# Altium PCB TypeC_proto.PcbDoc
Units mil, origin at the board's own origin, x right, y up, seen from the top; angles counter-clockwise.
Board outline 8818.9 x 2803.15 mil, 2 copper layers (Top Layer, Bottom Layer); 1 components, 0 nets, 2024 pads, 0 vias.
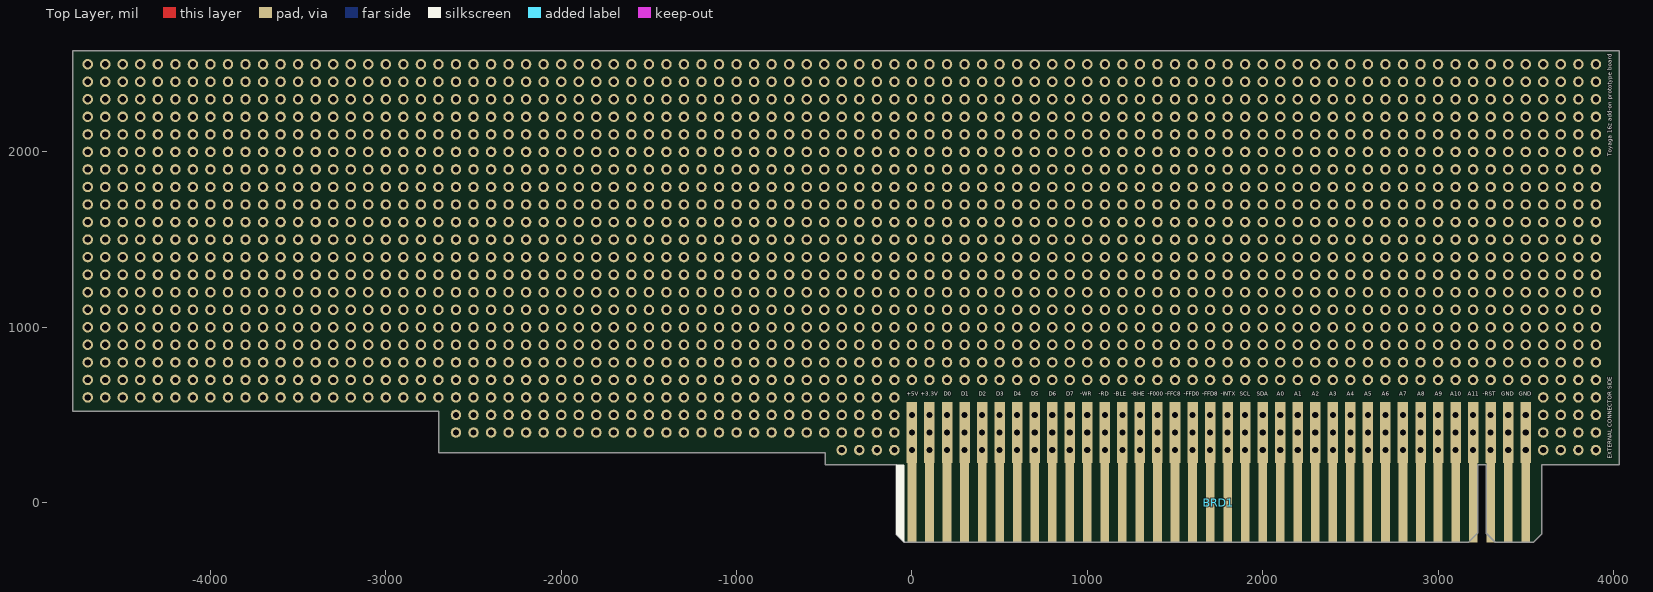
[diagram p0: Top Layer view]
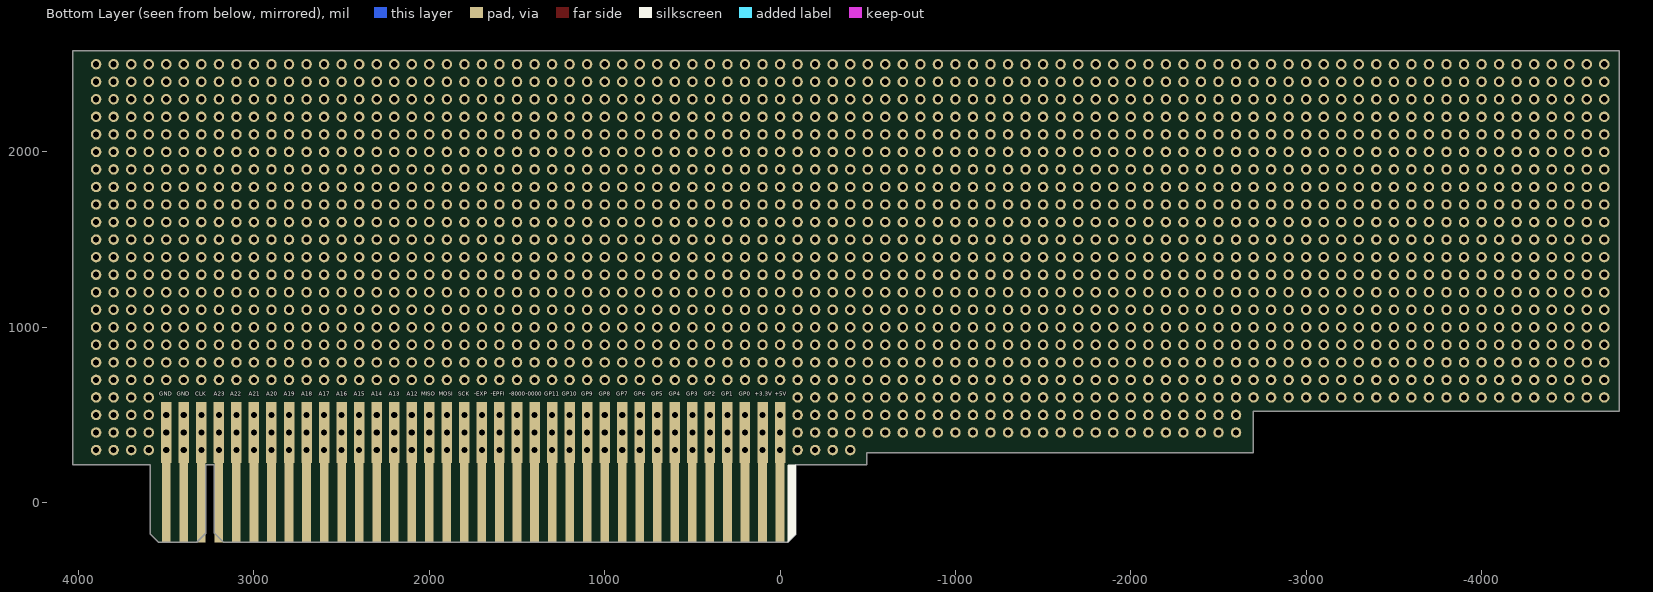
[diagram p1: Bottom Layer view, seen from below]

## Layer stack, top to bottom
Top Layer: signal copper 1.4
Dielectric: dielectric 12.6, FR-4, Dk 4.8
Bottom Layer: signal copper 1.4

## Board outline
-494.09,214.87 -90,214.87 -90,-180 -43.93,-226.07 3173.93,-226.07 3225,-175 3225,214.87 3275,214.87 3275,-175 3326.07,-226.07 3543.93,-226.07 3590,-180 3590,214.87 4033.46,214.87 4033.46,2577.08 -4785.43,2577.08 -4785.43,521.96 -2698.82,521.96 -2698.82,285.74 -494.09,285.74

## Design rules (kind name [scope] priority, off if disabled: settings)
Clearance [All] p1: gap=10
PolygonConnect [All] p1: connectstyle=Relief reliefconductorwidth=10 reliefentries=4 polygonreliefangle="90 Angle" airgapwidth=10
RoutingVias [All] p1: holewidth=28 width=50 viastyle="Through Hole" minholewidth=28 minwidth=50 maxholewidth=28 maxwidth=50
SolderMaskExpansion [All] p1: expansion=4
Width [All] p1: maxlimit=10 minlimit=10 preferedwidth=10
28 further rules are at their usual default settings.

## Components (designator, comment, footprint, x,y, rotation, side; value= is the part's Value field where it differs from the comment)
BRD1 "16z" 16z_sizeC 4033.46,214.87 r0 top locked

## Footprints (in the part's own frame and the unit in brackets; to place one, negate y for a bottom-side part, rotate by r counter-clockwise, add the part's x,y. Pads: shape width x height; smd on the part's side, far side on the other; paste and mask are expansions set on the pad)
16z_sizeC [mm] "Toyaga 16z add-on card size C (224mm length)"
  rect 1.25x11.5 smd: 1(-102.45,-5.458) 3(-99.91,-5.458) 5(-97.37,-5.458) 7(-94.83,-5.458) 9(-92.29,-5.458) 11(-89.75,-5.458) 13(-87.21,-5.458) 15(-84.67,-5.458) 17(-82.13,-5.458) 19(-79.59,-5.458) 21(-77.05,-5.458) 23(-74.51,-5.458) 25(-71.97,-5.458) 27(-69.43,-5.458) 29(-66.89,-5.458) 31(-64.35,-5.458) 33(-61.81,-5.458) 35(-59.27,-5.458) 37(-56.73,-5.458) 39(-54.19,-5.458) 41(-51.65,-5.458) 43(-49.11,-5.458) 45(-46.57,-5.458) 47(-44.03,-5.458) 49(-41.49,-5.458) 51(-38.95,-5.458) 53(-36.41,-5.458) 55(-33.87,-5.458) 57(-31.33,-5.458) 59(-28.79,-5.458) 61(-26.25,-5.458) 63(-23.71,-5.458) 65(-21.17,-5.458) 67(-18.63,-5.458) 69(-16.09,-5.458) 71(-13.55,-5.458)
  rect 1.25x11.5 smd far side: 2(-102.45,-5.458) 4(-99.91,-5.458) 6(-97.37,-5.458) 8(-94.83,-5.458) 10(-92.29,-5.458) 12(-89.75,-5.458) 14(-87.21,-5.458) 16(-84.67,-5.458) 18(-82.13,-5.458) 20(-79.59,-5.458) 22(-77.05,-5.458) 24(-74.51,-5.458) 26(-71.97,-5.458) 28(-69.43,-5.458) 30(-66.89,-5.458) 32(-64.35,-5.458) 34(-61.81,-5.458) 36(-59.27,-5.458) 38(-56.73,-5.458) 40(-54.19,-5.458) 42(-51.65,-5.458) 44(-49.11,-5.458) 46(-46.57,-5.458) 48(-44.03,-5.458) 50(-41.49,-5.458) 52(-38.95,-5.458) 54(-36.41,-5.458) 56(-33.87,-5.458) 58(-31.33,-5.458) 60(-28.79,-5.458) 62(-26.25,-5.458) 64(-23.71,-5.458) 66(-21.17,-5.458) 68(-18.63,-5.458) 70(-16.09,-5.458) 72(-13.55,-5.458)
  silkscreen extent -104.74,-11.2 -103.57,0

## Part data
BRD1: library part 16z_edge, "Toyaga 16z board edge connector"

## Free pads (board coordinates)
  round 60 hole 35: 0(-4700,600) 0(-4700,700) 0(-4700,800) 0(-4700,900) 0(-4700,1000) 0(-4700,1100) 0(-4700,1200) 0(-4700,1300) 0(-4700,1400) 0(-4700,1500) 0(-4700,1600) 0(-4700,1700) 0(-4700,1800) 0(-4700,1900) 0(-4700,2000) 0(-4700,2100) 0(-4700,2200) 0(-4700,2300) 0(-4700,2400) 0(-4700,2500) 0(-4600,600) 0(-4600,700) 0(-4600,800) 0(-4600,900) 0(-4600,1000) 0(-4600,1100) 0(-4600,1200) 0(-4600,1300) 0(-4600,1400) 0(-4600,1500) 0(-4600,1600) 0(-4600,1700) 0(-4600,1800) 0(-4600,1900) 0(-4600,2000) 0(-4600,2100) 0(-4600,2200) 0(-4600,2300) 0(-4600,2400) 0(-4600,2500) 0(-4500,600) 0(-4500,700) 0(-4500,800) 0(-4500,900) 0(-4500,1000) 0(-4500,1100) 0(-4500,1200) 0(-4500,1300) 0(-4500,1400) 0(-4500,1500) 0(-4500,1600) 0(-4500,1700) 0(-4500,1800) 0(-4500,1900) 0(-4500,2000) 0(-4500,2100) 0(-4500,2200) 0(-4500,2300) 0(-4500,2400) 0(-4500,2500) 0(-4400,600) 0(-4400,700) 0(-4400,800) 0(-4400,900) 0(-4400,1000) 0(-4400,1100) 0(-4400,1200) 0(-4400,1300) 0(-4400,1400) 0(-4400,1500) 0(-4400,1600) 0(-4400,1700) 0(-4400,1800) 0(-4400,1900) 0(-4400,2000) 0(-4400,2100) 0(-4400,2200) 0(-4400,2300) 0(-4400,2400) 0(-4400,2500) 0(-4300,600) 0(-4300,700) 0(-4300,800) 0(-4300,900) 0(-4300,1000) 0(-4300,1100) 0(-4300,1200) 0(-4300,1300) 0(-4300,1400) 0(-4300,1500) 0(-4300,1600) 0(-4300,1700) 0(-4300,1800) 0(-4300,1900) 0(-4300,2000) 0(-4300,2100) 0(-4300,2200) 0(-4300,2300) 0(-4300,2400) 0(-4300,2500) 0(-4200,600) 0(-4200,700) 0(-4200,800) 0(-4200,900) 0(-4200,1000) 0(-4200,1100) 0(-4200,1200) 0(-4200,1300) 0(-4200,1400) 0(-4200,1500) 0(-4200,1600) 0(-4200,1700) 0(-4200,1800) 0(-4200,1900) 0(-4200,2000) 0(-4200,2100) 0(-4200,2200) 0(-4200,2300) 0(-4200,2400) 0(-4200,2500) 0(-4100,600) 0(-4100,700) 0(-4100,800) 0(-4100,900) 0(-4100,1000) 0(-4100,1100) 0(-4100,1200) 0(-4100,1300) 0(-4100,1400) 0(-4100,1500) 0(-4100,1600) 0(-4100,1700) 0(-4100,1800) 0(-4100,1900) 0(-4100,2000) 0(-4100,2100) 0(-4100,2200) 0(-4100,2300) 0(-4100,2400) 0(-4100,2500) 0(-4000,600) 0(-4000,700) 0(-4000,800) 0(-4000,900) 0(-4000,1000) 0(-4000,1100) 0(-4000,1200) 0(-4000,1300) 0(-4000,1400) 0(-4000,1500) 0(-4000,1600) 0(-4000,1700) 0(-4000,1800) 0(-4000,1900) 0(-4000,2000) 0(-4000,2100) 0(-4000,2200) 0(-4000,2300) 0(-4000,2400) 0(-4000,2500) 0(-3900,600) 0(-3900,700) 0(-3900,800) 0(-3900,900) 0(-3900,1000) 0(-3900,1100) 0(-3900,1200) 0(-3900,1300) 0(-3900,1400) 0(-3900,1500) 0(-3900,1600) 0(-3900,1700) 0(-3900,1800) 0(-3900,1900) 0(-3900,2000) 0(-3900,2100) 0(-3900,2200) 0(-3900,2300) 0(-3900,2400) 0(-3900,2500) 0(-3800,600) 0(-3800,700) 0(-3800,800) 0(-3800,900) 0(-3800,1000) 0(-3800,1100) 0(-3800,1200) 0(-3800,1300) 0(-3800,1400) 0(-3800,1500) 0(-3800,1600) 0(-3800,1700) 0(-3800,1800) 0(-3800,1900) 0(-3800,2000) 0(-3800,2100) 0(-3800,2200) 0(-3800,2300) 0(-3800,2400) 0(-3800,2500) 0(-3700,600) 0(-3700,700) 0(-3700,800) 0(-3700,900) 0(-3700,1000) 0(-3700,1100) 0(-3700,1200) 0(-3700,1300) 0(-3700,1400) 0(-3700,1500) 0(-3700,1600) 0(-3700,1700) 0(-3700,1800) 0(-3700,1900) 0(-3700,2000) 0(-3700,2100) 0(-3700,2200) 0(-3700,2300) 0(-3700,2400) 0(-3700,2500) 0(-3600,600) 0(-3600,700) 0(-3600,800) 0(-3600,900) 0(-3600,1000) 0(-3600,1100) 0(-3600,1200) 0(-3600,1300) 0(-3600,1400) 0(-3600,1500) 0(-3600,1600) 0(-3600,1700) 0(-3600,1800) 0(-3600,1900) 0(-3600,2000) 0(-3600,2100) 0(-3600,2200) 0(-3600,2300) 0(-3600,2400) 0(-3600,2500) 0(-3500,600) 0(-3500,700) 0(-3500,800) 0(-3500,900) 0(-3500,1000) 0(-3500,1100) 0(-3500,1200) 0(-3500,1300) 0(-3500,1400) 0(-3500,1500) 0(-3500,1600) 0(-3500,1700) 0(-3500,1800) 0(-3500,1900) 0(-3500,2000) 0(-3500,2100) 0(-3500,2200) 0(-3500,2300) 0(-3500,2400) 0(-3500,2500) 0(-3400,600) 0(-3400,700) 0(-3400,800) 0(-3400,900) 0(-3400,1000) 0(-3400,1100) 0(-3400,1200) 0(-3400,1300) 0(-3400,1400) 0(-3400,1500) 0(-3400,1600) 0(-3400,1700) 0(-3400,1800) 0(-3400,1900) 0(-3400,2000) 0(-3400,2100) 0(-3400,2200) 0(-3400,2300) 0(-3400,2400) 0(-3400,2500) 0(-3300,600) 0(-3300,700) 0(-3300,800) 0(-3300,900) 0(-3300,1000) 0(-3300,1100) 0(-3300,1200) 0(-3300,1300) 0(-3300,1400) 0(-3300,1500) 0(-3300,1600) 0(-3300,1700) 0(-3300,1800) 0(-3300,1900) 0(-3300,2000) 0(-3300,2100) 0(-3300,2200) 0(-3300,2300) 0(-3300,2400) 0(-3300,2500) 0(-3200,600) 0(-3200,700) 0(-3200,800) 0(-3200,900) 0(-3200,1000) 0(-3200,1100) 0(-3200,1200) 0(-3200,1300) 0(-3200,1400) 0(-3200,1500) 0(-3200,1600) 0(-3200,1700) 0(-3200,1800) 0(-3200,1900) 0(-3200,2000) 0(-3200,2100) 0(-3200,2200) 0(-3200,2300) 0(-3200,2400) 0(-3200,2500) 0(-3100,600) 0(-3100,700) 0(-3100,800) 0(-3100,900) 0(-3100,1000) 0(-3100,1100) 0(-3100,1200) 0(-3100,1300) 0(-3100,1400) 0(-3100,1500) 0(-3100,1600) 0(-3100,1700) 0(-3100,1800) 0(-3100,1900) 0(-3100,2000) 0(-3100,2100) 0(-3100,2200) 0(-3100,2300) 0(-3100,2400) 0(-3100,2500) 0(-3000,600) 0(-3000,700) 0(-3000,800) 0(-3000,900) 0(-3000,1000) 0(-3000,1100) 0(-3000,1200) 0(-3000,1300) 0(-3000,1400) 0(-3000,1500) 0(-3000,1600) 0(-3000,1700) 0(-3000,1800) 0(-3000,1900) 0(-3000,2000) 0(-3000,2100) 0(-3000,2200) 0(-3000,2300) 0(-3000,2400) 0(-3000,2500) 0(-2900,600) 0(-2900,700) 0(-2900,800) 0(-2900,900) 0(-2900,1000) 0(-2900,1100) 0(-2900,1200) 0(-2900,1300) 0(-2900,1400) 0(-2900,1500) 0(-2900,1600) 0(-2900,1700) 0(-2900,1800) 0(-2900,1900) 0(-2900,2000) 0(-2900,2100) 0(-2900,2200) 0(-2900,2300) 0(-2900,2400) 0(-2900,2500) 0(-2800,600) 0(-2800,700) 0(-2800,800) 0(-2800,900) 0(-2800,1000) 0(-2800,1100) 0(-2800,1200) 0(-2800,1300) 0(-2800,1400) 0(-2800,1500) 0(-2800,1600) 0(-2800,1700) 0(-2800,1800) 0(-2800,1900) 0(-2800,2000) 0(-2800,2100) 0(-2800,2200) 0(-2800,2300) 0(-2800,2400) 0(-2800,2500) 0(-2700,600) 0(-2700,700) 0(-2700,800) 0(-2700,900) 0(-2700,1000) 0(-2700,1100) 0(-2700,1200) 0(-2700,1300) 0(-2700,1400) 0(-2700,1500) 0(-2700,1600) 0(-2700,1700) 0(-2700,1800) 0(-2700,1900) 0(-2700,2000) 0(-2700,2100) 0(-2700,2200) 0(-2700,2300) 0(-2700,2400) 0(-2700,2500) 0(-2600,400) 0(-2600,500) 0(-2600,600) 0(-2600,700) 0(-2600,800) 0(-2600,900) 0(-2600,1000) 0(-2600,1100) 0(-2600,1200) 0(-2600,1300) 0(-2600,1400) 0(-2600,1500) 0(-2600,1600) 0(-2600,1700) 0(-2600,1800) 0(-2600,1900) 0(-2600,2000) 0(-2600,2100) 0(-2600,2200) 0(-2600,2300) 0(-2600,2400) 0(-2600,2500) 0(-2500,400) 0(-2500,500) 0(-2500,600) 0(-2500,700) 0(-2500,800) 0(-2500,900) 0(-2500,1000) 0(-2500,1100) 0(-2500,1200) 0(-2500,1300) 0(-2500,1400) 0(-2500,1500) 0(-2500,1600) 0(-2500,1700) 0(-2500,1800) 0(-2500,1900) 0(-2500,2000) 0(-2500,2100) 0(-2500,2200) 0(-2500,2300) 0(-2500,2400) 0(-2500,2500) 0(-2400,400) 0(-2400,500) 0(-2400,600) 0(-2400,700) 0(-2400,800) 0(-2400,900) 0(-2400,1000) 0(-2400,1100) 0(-2400,1200) 0(-2400,1300) 0(-2400,1400) 0(-2400,1500) 0(-2400,1600) 0(-2400,1700) 0(-2400,1800) 0(-2400,1900) 0(-2400,2000) 0(-2400,2100) 0(-2400,2200) 0(-2400,2300) 0(-2400,2400) 0(-2400,2500) 0(-2300,400) 0(-2300,500) 0(-2300,600) 0(-2300,700) 0(-2300,800) 0(-2300,900) 0(-2300,1000) 0(-2300,1100) 0(-2300,1200) 0(-2300,1300) 0(-2300,1400) 0(-2300,1500) 0(-2300,1600) 0(-2300,1700) 0(-2300,1800) 0(-2300,1900) 0(-2300,2000) 0(-2300,2100) 0(-2300,2200) 0(-2300,2300) 0(-2300,2400) 0(-2300,2500) 0(-2200,400) 0(-2200,500) 0(-2200,600) 0(-2200,700) 0(-2200,800) 0(-2200,900) 0(-2200,1000) 0(-2200,1100) 0(-2200,1200) 0(-2200,1300) 0(-2200,1400) 0(-2200,1500) 0(-2200,1600) 0(-2200,1700) 0(-2200,1800) 0(-2200,1900) 0(-2200,2000) 0(-2200,2100) 0(-2200,2200) 0(-2200,2300) 0(-2200,2400) 0(-2200,2500) 0(-2100,400) 0(-2100,500) 0(-2100,600) 0(-2100,700) 0(-2100,800) 0(-2100,900) 0(-2100,1000) 0(-2100,1100) 0(-2100,1200) 0(-2100,1300) 0(-2100,1400) 0(-2100,1500) 0(-2100,1600) 0(-2100,1700) 0(-2100,1800) 0(-2100,1900) 0(-2100,2000) 0(-2100,2100) 0(-2100,2200) 0(-2100,2300) 0(-2100,2400) 0(-2100,2500) 0(-2000,400) 0(-2000,500) 0(-2000,600) 0(-2000,700) 0(-2000,800) 0(-2000,900) 0(-2000,1000) 0(-2000,1100) 0(-2000,1200) 0(-2000,1300) 0(-2000,1400) 0(-2000,1500) 0(-2000,1600) 0(-2000,1700) 0(-2000,1800) 0(-2000,1900) 0(-2000,2000) 0(-2000,2100) 0(-2000,2200) 0(-2000,2300) 0(-2000,2400) 0(-2000,2500) 0(-1900,400) 0(-1900,500) 0(-1900,600) 0(-1900,700) 0(-1900,800) 0(-1900,900) 0(-1900,1000) 0(-1900,1100) 0(-1900,1200) 0(-1900,1300) 0(-1900,1400) 0(-1900,1500) 0(-1900,1600) 0(-1900,1700) 0(-1900,1800) 0(-1900,1900) 0(-1900,2000) 0(-1900,2100) 0(-1900,2200) 0(-1900,2300) 0(-1900,2400) 0(-1900,2500) 0(-1800,400) 0(-1800,500) 0(-1800,600) 0(-1800,700) 0(-1800,800) 0(-1800,900) 0(-1800,1000) 0(-1800,1100) 0(-1800,1200) 0(-1800,1300) 0(-1800,1400) 0(-1800,1500) 0(-1800,1600) 0(-1800,1700) 0(-1800,1800) 0(-1800,1900) 0(-1800,2000) 0(-1800,2100) 0(-1800,2200) 0(-1800,2300) 0(-1800,2400) 0(-1800,2500) 0(-1700,400) 0(-1700,500) 0(-1700,600) 0(-1700,700) 0(-1700,800) 0(-1700,900) 0(-1700,1000) 0(-1700,1100) 0(-1700,1200) 0(-1700,1300) 0(-1700,1400) 0(-1700,1500) 0(-1700,1600) 0(-1700,1700) 0(-1700,1800) 0(-1700,1900) 0(-1700,2000) 0(-1700,2100) 0(-1700,2200) 0(-1700,2300) 0(-1700,2400) 0(-1700,2500) 0(-1600,400) 0(-1600,500) 0(-1600,600) 0(-1600,700) 0(-1600,800) 0(-1600,900) 0(-1600,1000) 0(-1600,1100) 0(-1600,1200) 0(-1600,1300) 0(-1600,1400) 0(-1600,1500) 0(-1600,1600) 0(-1600,1700) 0(-1600,1800) 0(-1600,1900) 0(-1600,2000) 0(-1600,2100) 0(-1600,2200) 0(-1600,2300) 0(-1600,2400) 0(-1600,2500) 0(-1500,400) 0(-1500,500) 0(-1500,600) 0(-1500,700) 0(-1500,800) 0(-1500,900) 0(-1500,1000) 0(-1500,1100) 0(-1500,1200) 0(-1500,1300) 0(-1500,1400) 0(-1500,1500) 0(-1500,1600) 0(-1500,1700) 0(-1500,1800) 0(-1500,1900) 0(-1500,2000) 0(-1500,2100) 0(-1500,2200) 0(-1500,2300) 0(-1500,2400) 0(-1500,2500) 0(-1400,400) 0(-1400,500) 0(-1400,600) 0(-1400,700) 0(-1400,800) 0(-1400,900) 0(-1400,1000) 0(-1400,1100) 0(-1400,1200) 0(-1400,1300) 0(-1400,1400) 0(-1400,1500) 0(-1400,1600) 0(-1400,1700) 0(-1400,1800) 0(-1400,1900) 0(-1400,2000) 0(-1400,2100) 0(-1400,2200) 0(-1400,2300) 0(-1400,2400) 0(-1400,2500) 0(-1300,400) 0(-1300,500) 0(-1300,600) 0(-1300,700) 0(-1300,800) 0(-1300,900) 0(-1300,1000) 0(-1300,1100) 0(-1300,1200) 0(-1300,1300) 0(-1300,1400) 0(-1300,1500) 0(-1300,1600) 0(-1300,1700) 0(-1300,1800) 0(-1300,1900) 0(-1300,2000) 0(-1300,2100) 0(-1300,2200) 0(-1300,2300) 0(-1300,2400) 0(-1300,2500) 0(-1200,400) 0(-1200,500) 0(-1200,600) 0(-1200,700) 0(-1200,800) 0(-1200,900) 0(-1200,1000) 0(-1200,1100) 0(-1200,1200) 0(-1200,1300) 0(-1200,1400) 0(-1200,1500) 0(-1200,1600) 0(-1200,1700) 0(-1200,1800) 0(-1200,1900) 0(-1200,2000) 0(-1200,2100) 0(-1200,2200) 0(-1200,2300) 0(-1200,2400) 0(-1200,2500) 0(-1100,400) 0(-1100,500) 0(-1100,600) 0(-1100,700) 0(-1100,800) 0(-1100,900) 0(-1100,1000) 0(-1100,1100) 0(-1100,1200) 0(-1100,1300) 0(-1100,1400) 0(-1100,1500) 0(-1100,1600) 0(-1100,1700) 0(-1100,1800) 0(-1100,1900) 0(-1100,2000) 0(-1100,2100) 0(-1100,2200) 0(-1100,2300) 0(-1100,2400) 0(-1100,2500) 0(-1000,400) 0(-1000,500) 0(-1000,600) 0(-1000,700) 0(-1000,800) 0(-1000,900) 0(-1000,1000) 0(-1000,1100) 0(-1000,1200) 0(-1000,1300) 0(-1000,1400) 0(-1000,1500) 0(-1000,1600) 0(-1000,1700) 0(-1000,1800) 0(-1000,1900) 0(-1000,2000) 0(-1000,2100) 0(-1000,2200) 0(-1000,2300) 0(-1000,2400) 0(-1000,2500) 0(-900,400) 0(-900,500) 0(-900,600) 0(-900,700) 0(-900,800) 0(-900,900) 0(-900,1000) 0(-900,1100) 0(-900,1200) 0(-900,1300) 0(-900,1400) 0(-900,1500) 0(-900,1600) 0(-900,1700) 0(-900,1800) 0(-900,1900) 0(-900,2000) 0(-900,2100) 0(-900,2200) 0(-900,2300) 0(-900,2400) 0(-900,2500) 0(-800,400) 0(-800,500) 0(-800,600) 0(-800,700) 0(-800,800) 0(-800,900) 0(-800,1000) 0(-800,1100) 0(-800,1200) 0(-800,1300) 0(-800,1400) 0(-800,1500) 0(-800,1600) 0(-800,1700) 0(-800,1800) 0(-800,1900) 0(-800,2000) 0(-800,2100) 0(-800,2200) 0(-800,2300) 0(-800,2400) 0(-800,2500) 0(-700,400) 0(-700,500) 0(-700,600) 0(-700,700) 0(-700,800) 0(-700,900) 0(-700,1000) 0(-700,1100) 0(-700,1200) 0(-700,1300) 0(-700,1400) 0(-700,1500) 0(-700,1600) 0(-700,1700) 0(-700,1800) 0(-700,1900) 0(-700,2000) 0(-700,2100) 0(-700,2200) 0(-700,2300) 0(-700,2400) 0(-700,2500) 0(-600,400) 0(-600,500) 0(-600,600) 0(-600,700) 0(-600,800) 0(-600,900) 0(-600,1000) 0(-600,1100) 0(-600,1200) 0(-600,1300) 0(-600,1400) 0(-600,1500) 0(-600,1600) 0(-600,1700) 0(-600,1800) 0(-600,1900) 0(-600,2000) 0(-600,2100) 0(-600,2200) 0(-600,2300) 0(-600,2400) 0(-600,2500) 0(-500,400) 0(-500,500) 0(-500,600) 0(-500,700) 0(-500,800) 0(-500,900) 0(-500,1000) 0(-500,1100) 0(-500,1200) 0(-500,1300) 0(-500,1400) 0(-500,1500) 0(-500,1600) 0(-500,1700) 0(-500,1800) 0(-500,1900) 0(-500,2000) 0(-500,2100) 0(-500,2200) 0(-500,2300) 0(-500,2400) 0(-500,2500) 0(-400,300) 0(-400,400) 0(-400,500) 0(-400,600) 0(-400,700) 0(-400,800) 0(-400,900) 0(-400,1000) 0(-400,1100) 0(-400,1200) 0(-400,1300) 0(-400,1400) 0(-400,1500) 0(-400,1600) 0(-400,1700) 0(-400,1800) 0(-400,1900) 0(-400,2000) 0(-400,2100) 0(-400,2200) 0(-400,2300) 0(-400,2400) 0(-400,2500) 0(-300,300) 0(-300,400) 0(-300,500) 0(-300,600) 0(-300,700) 0(-300,800) 0(-300,900) 0(-300,1000) 0(-300,1100) 0(-300,1200) 0(-300,1300) 0(-300,1400) 0(-300,1500) 0(-300,1600) 0(-300,1700) 0(-300,1800) 0(-300,1900) 0(-300,2000) 0(-300,2100) 0(-300,2200) 0(-300,2300) 0(-300,2400) 0(-300,2500) 0(-200,300) 0(-200,400) 0(-200,500) 0(-200,600) 0(-200,700) 0(-200,800) 0(-200,900) 0(-200,1000) 0(-200,1100) 0(-200,1200) 0(-200,1300) 0(-200,1400) 0(-200,1500) 0(-200,1600) 0(-200,1700) 0(-200,1800) 0(-200,1900) 0(-200,2000) 0(-200,2100) 0(-200,2200) 0(-200,2300) 0(-200,2400) 0(-200,2500) 0(-100,300) 0(-100,400) 0(-100,500) 0(-100,600) 0(-100,700) 0(-100,800) 0(-100,900) 0(-100,1000) 0(-100,1100) 0(-100,1200) 0(-100,1300) 0(-100,1400) 0(-100,1500) 0(-100,1600) 0(-100,1700) 0(-100,1800) 0(-100,1900) 0(-100,2000) 0(-100,2100) 0(-100,2200) 0(-100,2300) 0(-100,2400) 0(-100,2500) 0(0,300) 0(0,400) 0(0,500) 0(0,700) 0(0,800) 0(0,900) 0(0,1000) 0(0,1100) 0(0,1200) 0(0,1300) 0(0,1400) 0(0,1500) 0(0,1600) 0(0,1700) 0(0,1800) 0(0,1900) 0(0,2000) 0(0,2100) 0(0,2200) 0(0,2300) 0(0,2400) 0(0,2500) 0(100,300) 0(100,400) 0(100,500) 0(100,700) 0(100,800) 0(100,900) 0(100,1000) 0(100,1100) 0(100,1200) 0(100,1300) 0(100,1400) 0(100,1500) 0(100,1600) 0(100,1700) 0(100,1800) 0(100,1900) 0(100,2000) 0(100,2100) 0(100,2200) 0(100,2300) 0(100,2400) 0(100,2500) 0(200,300) 0(200,400) 0(200,500) 0(200,700) 0(200,800) 0(200,900) 0(200,1000) 0(200,1100) 0(200,1200) 0(200,1300) 0(200,1400) 0(200,1500) 0(200,1600) 0(200,1700) 0(200,1800) 0(200,1900) 0(200,2000) 0(200,2100) 0(200,2200) 0(200,2300) 0(200,2400) 0(200,2500) 0(300,300) 0(300,400) 0(300,500) 0(300,700) 0(300,800) 0(300,900) 0(300,1000) 0(300,1100) 0(300,1200) 0(300,1300) 0(300,1400) 0(300,1500) 0(300,1600) 0(300,1700) 0(300,1800) 0(300,1900) 0(300,2000) 0(300,2100) 0(300,2200) 0(300,2300) 0(300,2400) 0(300,2500) 0(400,300) 0(400,400) 0(400,500) 0(400,700) 0(400,800) 0(400,900) 0(400,1000) 0(400,1100) 0(400,1200) 0(400,1300) 0(400,1400) 0(400,1500) 0(400,1600) 0(400,1700) 0(400,1800) 0(400,1900) 0(400,2000) 0(400,2100) 0(400,2200) 0(400,2300) 0(400,2400) 0(400,2500) 0(500,300) 0(500,400) 0(500,500) 0(500,700) 0(500,800) 0(500,900) 0(500,1000) 0(500,1100) 0(500,1200) 0(500,1300) 0(500,1400) 0(500,1500) 0(500,1600) 0(500,1700) 0(500,1800) 0(500,1900) 0(500,2000) 0(500,2100) 0(500,2200) 0(500,2300) 0(500,2400) 0(500,2500) 0(600,300) 0(600,400) 0(600,500) 0(600,700) 0(600,800) 0(600,900) 0(600,1000) 0(600,1100) 0(600,1200) 0(600,1300) 0(600,1400) 0(600,1500) 0(600,1600) 0(600,1700) 0(600,1800) 0(600,1900) 0(600,2000) 0(600,2100) 0(600,2200) 0(600,2300) 0(600,2400) 0(600,2500) 0(700,300) 0(700,400) 0(700,500) 0(700,700) 0(700,800) 0(700,900) 0(700,1000) 0(700,1100) 0(700,1200) 0(700,1300) 0(700,1400) 0(700,1500) 0(700,1600) 0(700,1700) 0(700,1800) 0(700,1900) 0(700,2000) 0(700,2100) 0(700,2200) 0(700,2300) 0(700,2400) 0(700,2500) 0(800,300) 0(800,400) 0(800,500) 0(800,700) 0(800,800) 0(800,900) 0(800,1000) 0(800,1100) 0(800,1200) 0(800,1300) 0(800,1400) 0(800,1500) 0(800,1600) 0(800,1700) 0(800,1800) 0(800,1900) 0(800,2000) 0(800,2100) 0(800,2200) 0(800,2300) 0(800,2400) 0(800,2500) 0(900,300) 0(900,400) 0(900,500) 0(900,700) 0(900,800) 0(900,900) 0(900,1000) 0(900,1100) 0(900,1200) 0(900,1300) 0(900,1400) 0(900,1500) 0(900,1600) 0(900,1700) 0(900,1800) 0(900,1900) 0(900,2000) 0(900,2100) 0(900,2200) 0(900,2300) 0(900,2400) 0(900,2500) 0(1000,300) 0(1000,400) 0(1000,500) 0(1000,700) 0(1000,800) 0(1000,900) 0(1000,1000) 0(1000,1100) 0(1000,1200) 0(1000,1300) 0(1000,1400) 0(1000,1500) 0(1000,1600) 0(1000,1700) 0(1000,1800) 0(1000,1900) 0(1000,2000) 0(1000,2100) 0(1000,2200) 0(1000,2300) 0(1000,2400) 0(1000,2500) 0(1100,300) 0(1100,400) 0(1100,500) 0(1100,700) 0(1100,800) 0(1100,900) 0(1100,1000) 0(1100,1100) 0(1100,1200) 0(1100,1300) 0(1100,1400) 0(1100,1500) 0(1100,1600) 0(1100,1700) 0(1100,1800) 0(1100,1900) 0(1100,2000) 0(1100,2100) 0(1100,2200) 0(1100,2300) 0(1100,2400) 0(1100,2500) 0(1200,300) 0(1200,400) 0(1200,500) 0(1200,700) 0(1200,800) 0(1200,900) 0(1200,1000) 0(1200,1100) 0(1200,1200) 0(1200,1300) 0(1200,1400) 0(1200,1500) 0(1200,1600) 0(1200,1700) 0(1200,1800) 0(1200,1900) 0(1200,2000) 0(1200,2100) 0(1200,2200) 0(1200,2300) 0(1200,2400) 0(1200,2500) 0(1300,300) 0(1300,400) 0(1300,500) 0(1300,700) 0(1300,800) 0(1300,900) 0(1300,1000) 0(1300,1100) 0(1300,1200) 0(1300,1300) 0(1300,1400) 0(1300,1500) 0(1300,1600) 0(1300,1700) 0(1300,1800) 0(1300,1900) 0(1300,2000) 0(1300,2100) 0(1300,2200) 0(1300,2300) 0(1300,2400) 0(1300,2500) 0(1400,300) 0(1400,400) 0(1400,500) 0(1400,700) 0(1400,800) 0(1400,900) 0(1400,1000) 0(1400,1100) 0(1400,1200) 0(1400,1300) 0(1400,1400) 0(1400,1500) 0(1400,1600) 0(1400,1700) 0(1400,1800) 0(1400,1900) 0(1400,2000) 0(1400,2100) 0(1400,2200) 0(1400,2300) 0(1400,2400) 0(1400,2500) 0(1500,300) 0(1500,400) 0(1500,500) 0(1500,700) 0(1500,800) 0(1500,900) 0(1500,1000) 0(1500,1100) 0(1500,1200) 0(1500,1300) 0(1500,1400) 0(1500,1500) 0(1500,1600) 0(1500,1700) 0(1500,1800) 0(1500,1900) 0(1500,2000) 0(1500,2100) 0(1500,2200) 0(1500,2300) 0(1500,2400) 0(1500,2500) 0(1600,300) 0(1600,400) 0(1600,500) 0(1600,700) 0(1600,800) 0(1600,900) 0(1600,1000) 0(1600,1100) 0(1600,1200) 0(1600,1300) 0(1600,1400) 0(1600,1500) 0(1600,1600) 0(1600,1700) 0(1600,1800) 0(1600,1900) 0(1600,2000) 0(1600,2100) 0(1600,2200) 0(1600,2300) 0(1600,2400) 0(1600,2500) 0(1700,300) 0(1700,400) 0(1700,500) 0(1700,700) 0(1700,800) 0(1700,900) 0(1700,1000) 0(1700,1100) 0(1700,1200) 0(1700,1300) 0(1700,1400) 0(1700,1500) 0(1700,1600) 0(1700,1700) 0(1700,1800) 0(1700,1900) 0(1700,2000) 0(1700,2100) 0(1700,2200) 0(1700,2300) 0(1700,2400) 0(1700,2500) 0(1800,300) 0(1800,400) 0(1800,500) 0(1800,700) 0(1800,800) 0(1800,900) 0(1800,1000) 0(1800,1100) 0(1800,1200) 0(1800,1300) 0(1800,1400) 0(1800,1500) 0(1800,1600) 0(1800,1700) 0(1800,1800) 0(1800,1900) 0(1800,2000) 0(1800,2100) 0(1800,2200) 0(1800,2300) 0(1800,2400) 0(1800,2500) 0(1900,300) 0(1900,400) 0(1900,500) 0(1900,700) 0(1900,800) 0(1900,900) 0(1900,1000) 0(1900,1100) 0(1900,1200) 0(1900,1300) 0(1900,1400) 0(1900,1500) 0(1900,1600) 0(1900,1700) 0(1900,1800) 0(1900,1900) 0(1900,2000) 0(1900,2100) 0(1900,2200) 0(1900,2300) 0(1900,2400) 0(1900,2500) 0(2000,300) 0(2000,400) 0(2000,500) 0(2000,700) 0(2000,800) 0(2000,900) 0(2000,1000) 0(2000,1100) 0(2000,1200) 0(2000,1300) 0(2000,1400) 0(2000,1500) 0(2000,1600) 0(2000,1700) 0(2000,1800) 0(2000,1900) 0(2000,2000) 0(2000,2100) 0(2000,2200) 0(2000,2300) 0(2000,2400) 0(2000,2500) 0(2100,300) 0(2100,400) 0(2100,500) 0(2100,700) 0(2100,800) 0(2100,900) 0(2100,1000) 0(2100,1100) 0(2100,1200) 0(2100,1300) 0(2100,1400) 0(2100,1500) 0(2100,1600) 0(2100,1700) 0(2100,1800) 0(2100,1900) 0(2100,2000) 0(2100,2100) 0(2100,2200) 0(2100,2300) 0(2100,2400) 0(2100,2500) 0(2200,300) 0(2200,400) 0(2200,500) 0(2200,700) 0(2200,800) 0(2200,900) 0(2200,1000) 0(2200,1100) 0(2200,1200) 0(2200,1300) 0(2200,1400) 0(2200,1500) 0(2200,1600) 0(2200,1700) 0(2200,1800) 0(2200,1900) 0(2200,2000) 0(2200,2100) 0(2200,2200) 0(2200,2300) 0(2200,2400) 0(2200,2500) 0(2300,300) 0(2300,400) 0(2300,500) 0(2300,700) 0(2300,800) 0(2300,900) 0(2300,1000) 0(2300,1100) 0(2300,1200) 0(2300,1300) 0(2300,1400) 0(2300,1500) 0(2300,1600) 0(2300,1700) 0(2300,1800) 0(2300,1900) 0(2300,2000) 0(2300,2100) 0(2300,2200) 0(2300,2300) 0(2300,2400) 0(2300,2500) 0(2400,300) 0(2400,400) 0(2400,500) 0(2400,700) 0(2400,800) 0(2400,900) 0(2400,1000) 0(2400,1100) 0(2400,1200) 0(2400,1300) 0(2400,1400) 0(2400,1500) 0(2400,1600) 0(2400,1700) 0(2400,1800) 0(2400,1900) 0(2400,2000) 0(2400,2100) 0(2400,2200) 0(2400,2300) 0(2400,2400) 0(2400,2500) 0(2500,300) 0(2500,400) 0(2500,500) 0(2500,700) 0(2500,800) 0(2500,900) 0(2500,1000) 0(2500,1100) 0(2500,1200) 0(2500,1300) 0(2500,1400) 0(2500,1500) 0(2500,1600) 0(2500,1700) 0(2500,1800) 0(2500,1900) 0(2500,2000) 0(2500,2100) 0(2500,2200) 0(2500,2300) 0(2500,2400) 0(2500,2500) 0(2600,300) 0(2600,400) 0(2600,500) 0(2600,700) 0(2600,800) 0(2600,900) 0(2600,1000) 0(2600,1100) 0(2600,1200) 0(2600,1300) 0(2600,1400) 0(2600,1500) 0(2600,1600) 0(2600,1700) 0(2600,1800) 0(2600,1900) 0(2600,2000) 0(2600,2100) 0(2600,2200) 0(2600,2300) 0(2600,2400) 0(2600,2500) 0(2700,300) 0(2700,400) 0(2700,500) 0(2700,700) 0(2700,800) 0(2700,900) 0(2700,1000) 0(2700,1100) 0(2700,1200) 0(2700,1300) 0(2700,1400) 0(2700,1500) 0(2700,1600) 0(2700,1700) 0(2700,1800) 0(2700,1900) 0(2700,2000) 0(2700,2100) 0(2700,2200) 0(2700,2300) 0(2700,2400) 0(2700,2500) 0(2800,300) 0(2800,400) 0(2800,500) 0(2800,700) 0(2800,800) 0(2800,900) 0(2800,1000) 0(2800,1100) 0(2800,1200) 0(2800,1300) 0(2800,1400) 0(2800,1500) 0(2800,1600) 0(2800,1700) 0(2800,1800) 0(2800,1900) 0(2800,2000) 0(2800,2100) 0(2800,2200) 0(2800,2300) 0(2800,2400) 0(2800,2500) 0(2900,300) 0(2900,400) 0(2900,500) 0(2900,700) 0(2900,800) 0(2900,900) 0(2900,1000) 0(2900,1100) 0(2900,1200) 0(2900,1300) 0(2900,1400) 0(2900,1500) 0(2900,1600) 0(2900,1700) 0(2900,1800) 0(2900,1900) 0(2900,2000) 0(2900,2100) 0(2900,2200) 0(2900,2300) 0(2900,2400) 0(2900,2500) 0(3000,300) 0(3000,400) 0(3000,500) 0(3000,700) 0(3000,800) 0(3000,900) 0(3000,1000) 0(3000,1100) 0(3000,1200) 0(3000,1300) 0(3000,1400) 0(3000,1500) 0(3000,1600) 0(3000,1700) 0(3000,1800) 0(3000,1900) 0(3000,2000) 0(3000,2100) 0(3000,2200) 0(3000,2300) 0(3000,2400) 0(3000,2500) 0(3100,300) 0(3100,400) 0(3100,500) 0(3100,700) 0(3100,800) 0(3100,900) 0(3100,1000) 0(3100,1100) 0(3100,1200) 0(3100,1300) 0(3100,1400) 0(3100,1500) 0(3100,1600) 0(3100,1700) 0(3100,1800) 0(3100,1900) 0(3100,2000) 0(3100,2100) 0(3100,2200) 0(3100,2300) 0(3100,2400) 0(3100,2500) 0(3200,300) 0(3200,400) 0(3200,500) 0(3200,700) 0(3200,800) 0(3200,900) 0(3200,1000) 0(3200,1100) 0(3200,1200) 0(3200,1300) 0(3200,1400) 0(3200,1500) 0(3200,1600) 0(3200,1700) 0(3200,1800) 0(3200,1900) 0(3200,2000) 0(3200,2100) 0(3200,2200) 0(3200,2300) 0(3200,2400) 0(3200,2500) 0(3300,300) 0(3300,400) 0(3300,500) 0(3300,700) 0(3300,800) 0(3300,900) 0(3300,1000) 0(3300,1100) 0(3300,1200) 0(3300,1300) 0(3300,1400) 0(3300,1500) 0(3300,1600) 0(3300,1700) 0(3300,1800) 0(3300,1900) 0(3300,2000) 0(3300,2100) 0(3300,2200) 0(3300,2300) 0(3300,2400) 0(3300,2500) 0(3400,300) 0(3400,400) 0(3400,500) 0(3400,700) 0(3400,800) 0(3400,900) 0(3400,1000) 0(3400,1100) 0(3400,1200) 0(3400,1300) 0(3400,1400) 0(3400,1500) 0(3400,1600) 0(3400,1700) 0(3400,1800) 0(3400,1900) 0(3400,2000) 0(3400,2100) 0(3400,2200) 0(3400,2300) 0(3400,2400) 0(3400,2500) 0(3500,300) 0(3500,400) 0(3500,500) 0(3500,700) 0(3500,800) 0(3500,900) 0(3500,1000) 0(3500,1100) 0(3500,1200) 0(3500,1300) 0(3500,1400) 0(3500,1500) 0(3500,1600) 0(3500,1700) 0(3500,1800) 0(3500,1900) 0(3500,2000) 0(3500,2100) 0(3500,2200) 0(3500,2300) 0(3500,2400) 0(3500,2500) 0(3600,300) 0(3600,400) 0(3600,500) 0(3600,600) 0(3600,700) 0(3600,800) 0(3600,900) 0(3600,1000) 0(3600,1100) 0(3600,1200) 0(3600,1300) 0(3600,1400) 0(3600,1500) 0(3600,1600) 0(3600,1700) 0(3600,1800) 0(3600,1900) 0(3600,2000) 0(3600,2100) 0(3600,2200) 0(3600,2300) 0(3600,2400) 0(3600,2500) 0(3700,300) 0(3700,400) 0(3700,500) 0(3700,600) 0(3700,700) 0(3700,800) 0(3700,900) 0(3700,1000) 0(3700,1100) 0(3700,1200) 0(3700,1300) 0(3700,1400) 0(3700,1500) 0(3700,1600) 0(3700,1700) 0(3700,1800) 0(3700,1900) 0(3700,2000) 0(3700,2100) 0(3700,2200) 0(3700,2300) 0(3700,2400) 0(3700,2500) 0(3800,300) 0(3800,400) 0(3800,500) 0(3800,600) 0(3800,700) 0(3800,800) 0(3800,900) 0(3800,1000) 0(3800,1100) 0(3800,1200) 0(3800,1300) 0(3800,1400) 0(3800,1500) 0(3800,1600) 0(3800,1700) 0(3800,1800) 0(3800,1900) 0(3800,2000) 0(3800,2100) 0(3800,2200) 0(3800,2300) 0(3800,2400) 0(3800,2500) 0(3900,300) 0(3900,400) 0(3900,500) 0(3900,600) 0(3900,700) 0(3900,800) 0(3900,900) 0(3900,1000) 0(3900,1100) 0(3900,1200) 0(3900,1300) 0(3900,1400) 0(3900,1500) 0(3900,1600) 0(3900,1700) 0(3900,1800) 0(3900,1900) 0(3900,2000) 0(3900,2100) 0(3900,2200) 0(3900,2300) 0(3900,2400) 0(3900,2500)
  rect 60x350 smd: 1(0,400) 3(100,400) 5(200,400) 7(300,400) 9(400,400) 11(500,400) 13(600,400) 15(700,400) 17(800,400) 19(900,400) 21(1000,400) 23(1100,400) 25(1200,400) 27(1300,400) 29(1400,400) 31(1500,400) 33(1600,400) 35(1700,400) 37(1800,400) 39(1900,400) 41(2000,400) 43(2100,400) 45(2200,400) 47(2300,400) 49(2400,400) 51(2500,400) 53(2600,400) 55(2700,400) 57(2800,400) 59(2900,400) 61(3000,400) 63(3100,400) 65(3200,400) 67(3300,400) 69(3400,400) 71(3500,400)
  rect 60x350 smd far side: 2(0,400) 4(100,400) 6(200,400) 8(300,400) 10(400,400) 12(500,400) 14(600,400) 16(700,400) 18(800,400) 20(900,400) 22(1000,400) 24(1100,400) 26(1200,400) 28(1300,400) 30(1400,400) 32(1500,400) 34(1600,400) 36(1700,400) 38(1800,400) 40(1900,400) 42(2000,400) 44(2100,400) 46(2200,400) 48(2300,400) 50(2400,400) 52(2500,400) 54(2600,400) 56(2700,400) 58(2800,400) 60(2900,400) 62(3000,400) 64(3100,400) 66(3200,400) 68(3300,400) 70(3400,400) 72(3500,400)

## Nets (pads, with @x,y where several pads share a name; then routed paths per layer and width w, separated by ;. In a path a pad name is that pad's centre, name@x,y a point inside that pad or via, vN(x,y) a via of type N, cw(c..) or ccw(c..) an arc to the next point about the centre after c; other vN are vias at no path point)
pads on no net: BRD1.1 BRD1.2 BRD1.3 BRD1.4 BRD1.5 BRD1.6 BRD1.7 BRD1.8 BRD1.9 BRD1.10 BRD1.11 BRD1.12 BRD1.13 BRD1.14 BRD1.15 BRD1.16 BRD1.17 BRD1.18 BRD1.19 BRD1.20 BRD1.21 BRD1.22 BRD1.23 BRD1.24 BRD1.25 BRD1.26 BRD1.27 BRD1.28 BRD1.29 BRD1.30 BRD1.31 BRD1.32 BRD1.33 BRD1.34 BRD1.35 BRD1.36 BRD1.37 BRD1.38 BRD1.39 BRD1.40 BRD1.41 BRD1.42 BRD1.43 BRD1.44 BRD1.45 BRD1.46 BRD1.47 BRD1.48 BRD1.49 BRD1.50 BRD1.51 BRD1.52 BRD1.53 BRD1.54 BRD1.55 BRD1.56 BRD1.57 BRD1.58 BRD1.59 BRD1.60 BRD1.61 BRD1.62 BRD1.63 BRD1.64 BRD1.65 BRD1.66 BRD1.67 BRD1.68 BRD1.69 BRD1.70 BRD1.71 BRD1.72

## Silkscreen, mask and mechanical layers (free items; w line width, h text height)
Top Overlay:
  text "Toyaga 16z add-on prototype board" at 4000,1975 h39.37 r90
  text "+5V" at -30,600 h39.37
  text "+3.3V" at 50,600 h39.37
  text "D0" at 180,600 h39.37
  text "D1" at 280,600 h39.37
  text "D2" at 380,600 h39.37
  text "D3" at 480,600 h39.37
  text "D4" at 580,600 h39.37
  text "D5" at 680,600 h39.37
  text "D6" at 780,600 h39.37
  text "D7" at 880,600 h39.37
  text "-WR" at 960,600 h39.37
  text "-RD" at 1065,600 h39.37
  text "-BLE" at 1150,600 h39.37
  text "-BHE" at 1250,600 h39.37
  text "-F000" at 1345,600 h39.37
  text "-FFC8" at 1445,600 h39.37
  text "-FFD0" at 1550,600 h39.37
  text "-FFD8" at 1655,600 h39.37
  text "-INTX" at 1760,600 h39.37
  text "SCL" at 1870,600 h39.37
  text "SDA" at 1965,600 h39.37
  text "A0" at 2080,600 h39.37
  text "A1" at 2180,600 h39.37
  text "A2" at 2280,600 h39.37
  text "A3" at 2380,600 h39.37
  text "A4" at 2480,600 h39.37
  text "A5" at 2580,600 h39.37
  text "A6" at 2680,600 h39.37
  text "A7" at 2780,600 h39.37
  text "A8" at 2880,600 h39.37
  text "A9" at 2980,600 h39.37
  text "A10" at 3070,600 h39.37
  text "A11" at 3170,600 h39.37
  text "-RST" at 3255,600 h39.37
  text "GND" at 3360,600 h39.37
  text "GND" at 3460,600 h39.37
  text "EXTERNAL CONNECTOR SIDE" at 4000,250 h39.37 r90
Bottom Overlay:
  text "+5V" at 30,600 h39.37
  text "+3.3V" at 145,600 h39.37
  text "GP0" at 235,600 h39.37
  text "GP1" at 335,600 h39.37
  text "GP2" at 435,600 h39.37
  text "GP3" at 535,600 h39.37
  text "GP4" at 635,600 h39.37
  text "GP5" at 735,600 h39.37
  text "GP6" at 835,600 h39.37
  text "GP7" at 935,600 h39.37
  text "GP8" at 1035,600 h39.37
  text "GP9" at 1135,600 h39.37
  text "GP10" at 1245,600 h39.37
  text "GP11" at 1345,600 h39.37
  text "-0000" at 1450,600 h39.37
  text "-8000" at 1545,600 h39.37
  text "-EPFI" at 1650,600 h39.37
  text "-EXP" at 1745,600 h39.37
  text "SCK" at 1835,600 h39.37
  text "MOSI" at 1945,600 h39.37
  text "MISO" at 2045,600 h39.37
  text "A12" at 2130,600 h39.37
  text "A13" at 2230,600 h39.37
  text "A14" at 2330,600 h39.37
  text "A15" at 2430,600 h39.37
  text "A16" at 2530,600 h39.37
  text "A17" at 2630,600 h39.37
  text "A18" at 2730,600 h39.37
  text "A19" at 2830,600 h39.37
  text "A20" at 2930,600 h39.37
  text "A21" at 3030,600 h39.37
  text "A22" at 3135,600 h39.37
  text "A23" at 3230,600 h39.37
  text "CLK" at 3335,600 h39.37
  text "GND" at 3440,600 h39.37
  text "GND" at 3540,600 h39.37

## Text inside footprints (layer, text, board x,y; h text height)
BRD1: Drill Guide "EXTERNAL CONNECTOR SIDE" at 4190.94,529.83 h78.74 r90